# Altium PCB us_#1.PcbDoc
Units mm, origin at the board's own origin, x right, y up, seen from the top; angles counter-clockwise.
Board outline 35.5 x 50 mm, 2 copper layers (Top Layer, Bottom Layer); 23 components, 13 nets, 121 pads, 7 vias.
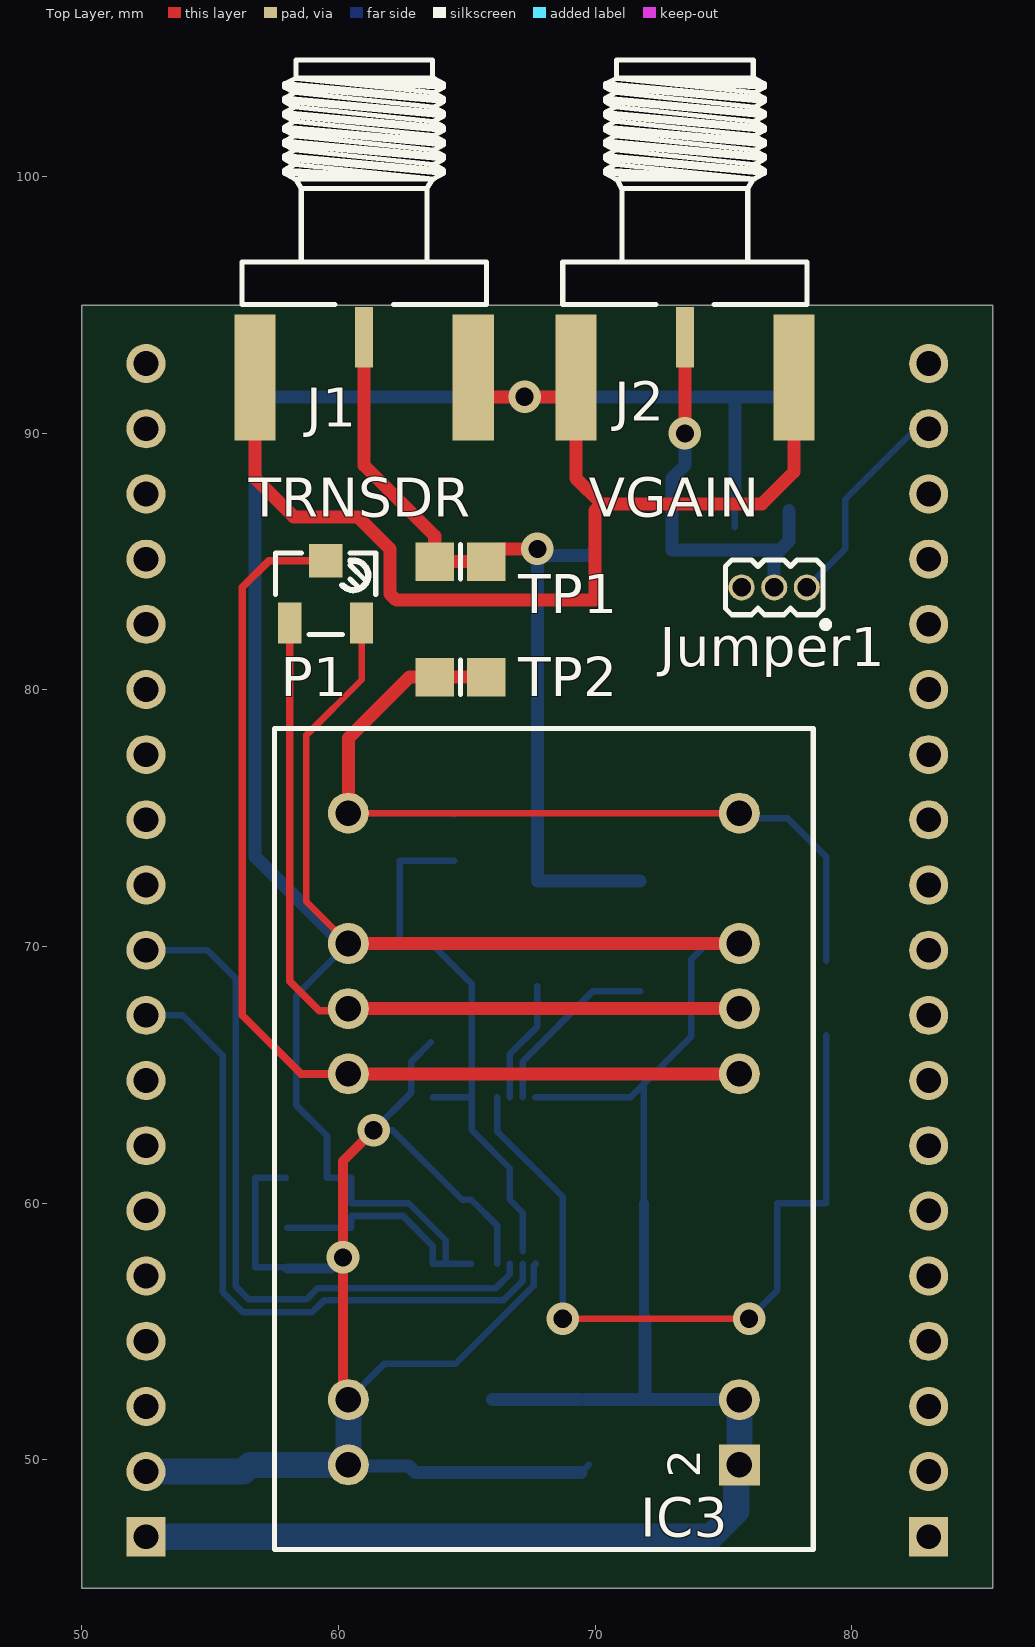
[diagram p0: Top Layer view]
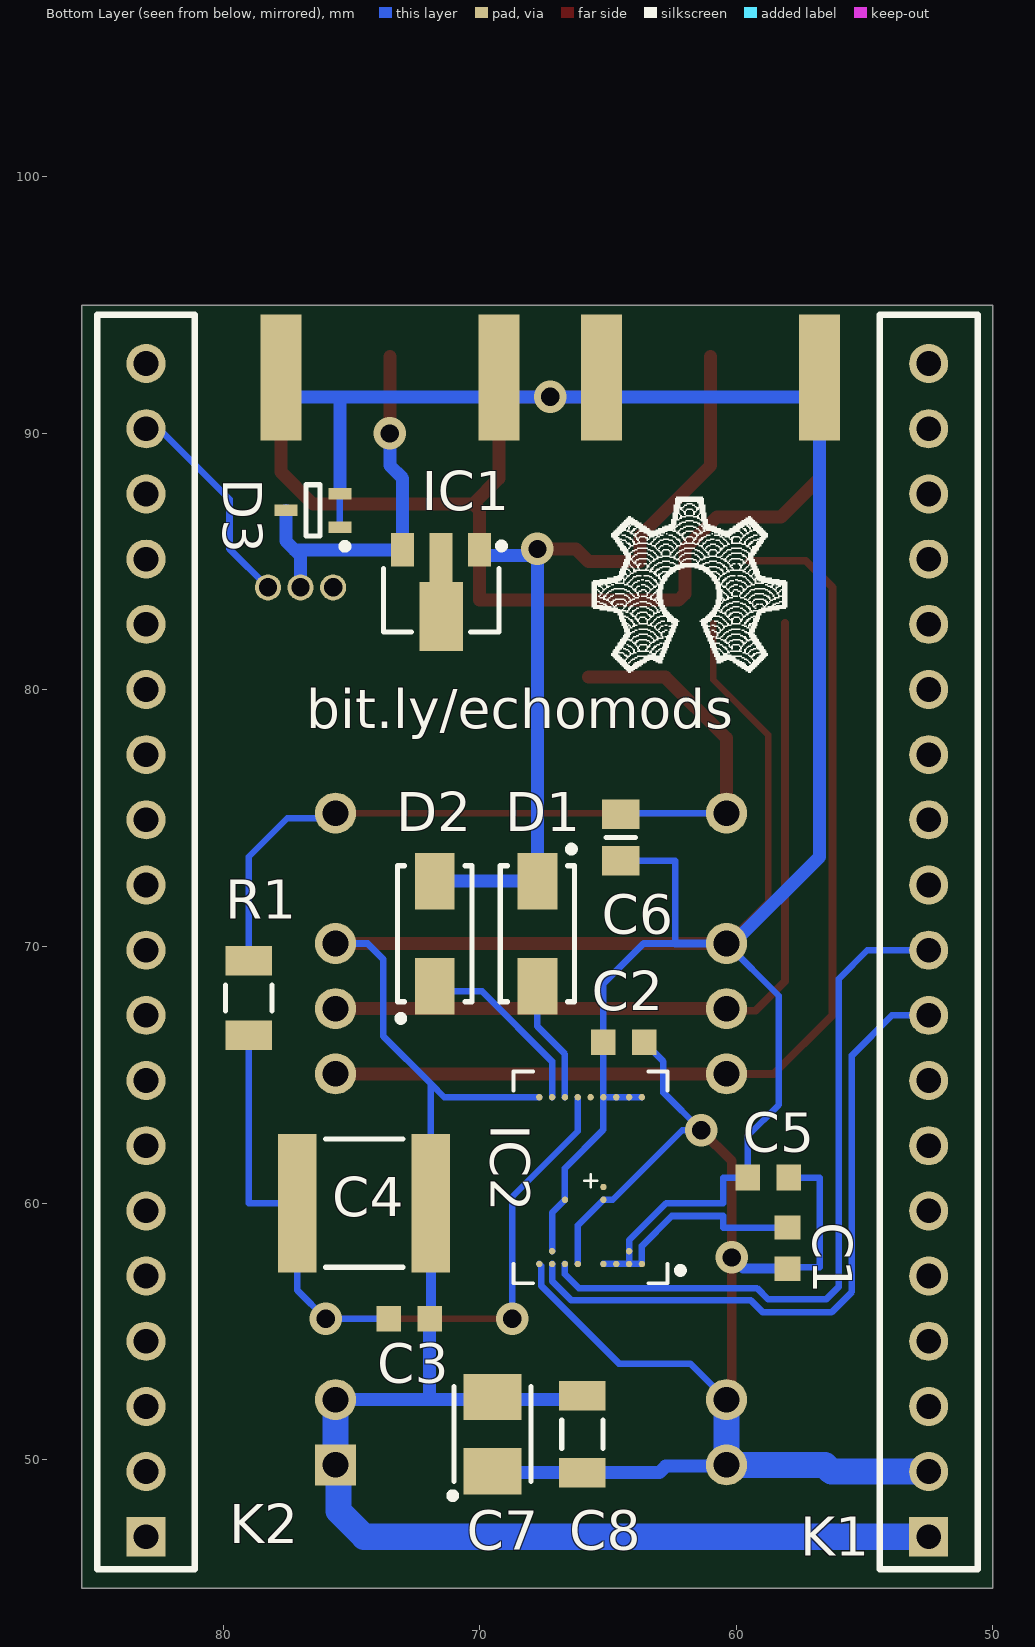
[diagram p1: Bottom Layer view, seen from below]
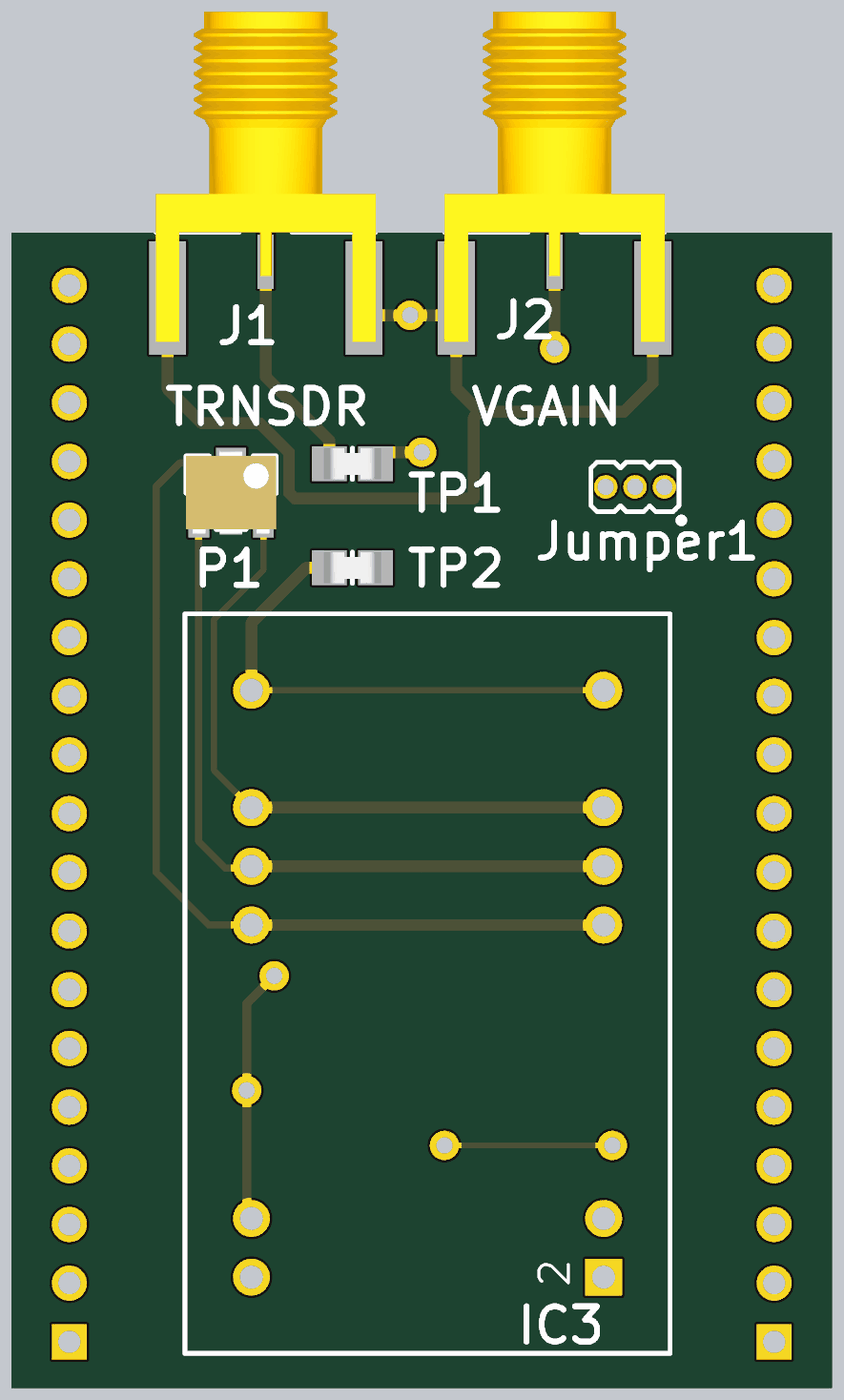
[diagram p2: 3D render of the assembled board from above, using the file's embedded part models]
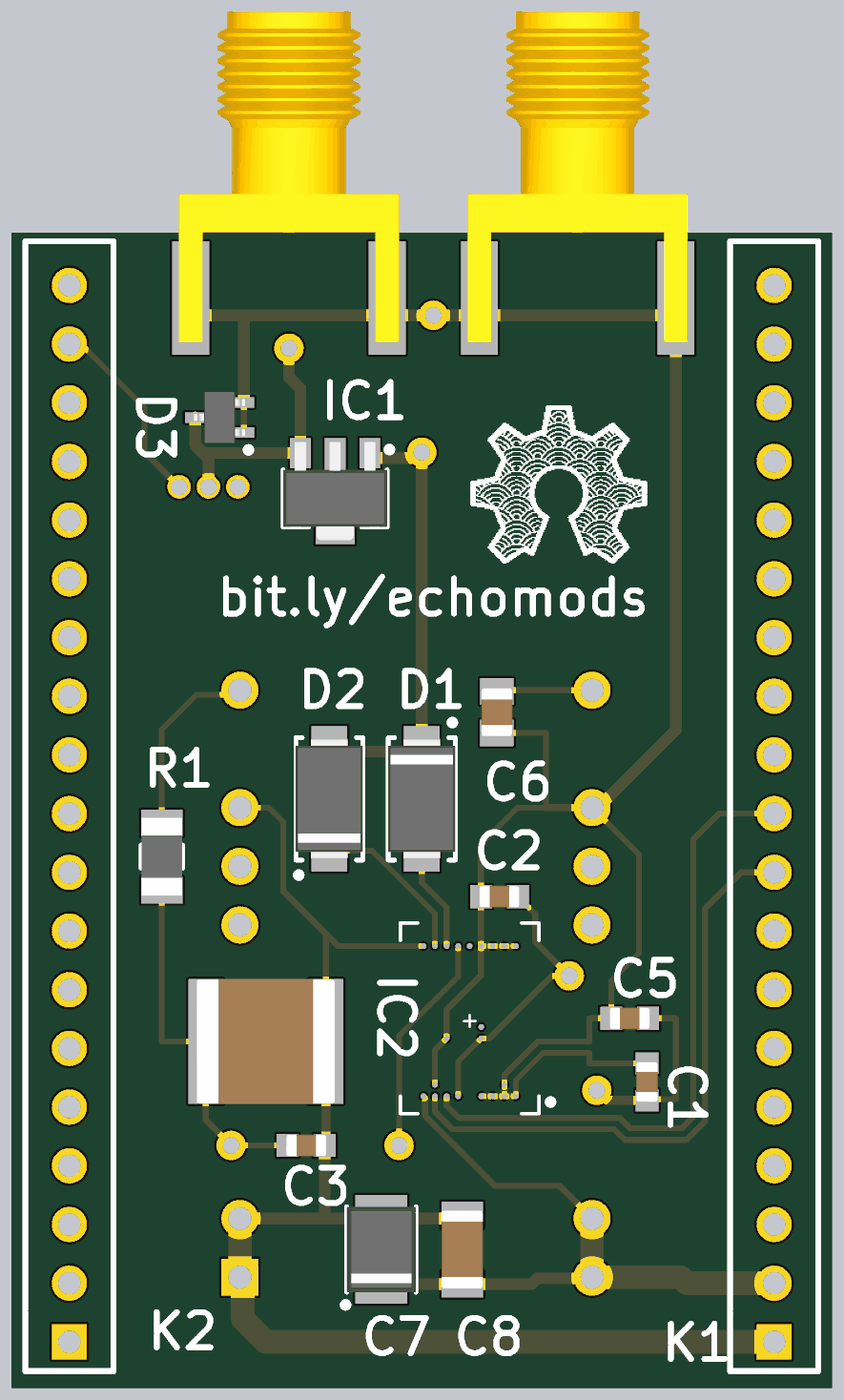
[diagram p3: 3D render of the assembled board from below, using the file's embedded part models]

## Layer stack, top to bottom
Top Solder: solder mask 0.0102, Solder Resist, Dk 3.5
Top Layer: signal copper 0.0356
Dielectric 1: dielectric 0.32, FR-4, Dk 4.8
Bottom Layer: signal copper 0.0356
Bottom Solder: solder mask 0.0102, Solder Resist, Dk 3.5

## Board outline
50,45 85.5,45 85.5,95 50,95

## Design rules (kind name [scope] priority, off if disabled: settings)
Clearance [All] p1: gap=0.178
MinimumSolderMaskSliver [All] p1 off: minsoldermaskwidth=0.2
PolygonConnect [All] p1: connectstyle=Relief reliefconductorwidth=0.254 reliefentries=4 polygonreliefangle="90 Angle" airgapwidth=0.254
RoutingVias [All] p1: holewidth=0.711 width=1.27 viastyle="Through Hole" minholewidth=0.711 minwidth=1.27 maxholewidth=0.711 maxwidth=1.27
SilkToSilkClearance [All] p1 off: silktosilkclearance=0.254
SilkToSolderMaskClearance [IsPad] p1 off: minsilkscreentomaskgap=0.2 clearancetoexposedcopper=TRUE
SolderMaskExpansion [All] p1: expansion=0.102
Width [All] p1: maxlimit=1.016 minlimit=0.254 preferedwidth=0.254 minimp=50.000000 maximp=50.000000 favimp=50.000000
27 further rules are at their usual default settings.

## Classes and differential pairs
net class RF: NetD1_1 NetD3_3

## Components (designator, comment, footprint, x,y, rotation, side; value= is the part's Value field where it differs from the comment)
C1 "100nF" CAPC1608X87N 58,58.25 r270 bottom
C2 "100nF" CAPC1608X87N 64.389,66.269 r180 bottom
C3 "100nF" CAPC1608X87N 72.75,55.5 r0 bottom
C4 "1uF" CAPC5650X165N 74.5,60 r0 bottom
C5 "100nF" CAPC1608X87N 58.75,61 r180 bottom
C6 "4.7nF" CAPC2012X110N 64.5,74.25 r90 bottom
C7 "10uF" CAPMP3528X210N 69.5,51 r90 bottom
C8 "47uF" CAPC3216X180N 66,51 r270 bottom
D1 "ES1D" DIOM5027X244N 67.75,70.5 r270 bottom
D2 "ES1D" DIOM5027X244N 71.75,70.5 r90 bottom
D3 "BAT64-04W" SOT65P210X100-3N 76.5,87 r0 bottom
IC1 "MD0100N8-G" SOT89 71.5,83.5 r270 bottom
IC2 "HV7360LA-G" HV7360_BGA 63.676,64.13 r0 bottom
IC3 "R05-100B" PWS_RECOM_R05-100B 68,62.5 r90 top
J1 "SMA" AMPHENOL_132357-11 61,93.75 r270 top
J2 "SMA" AMPHENOL_132357-11 73.5,93.75 r270 top
Jumper1 "Family" SULLINS_GRPB031VWVN 78.25,84 r180 top
K1 "PLS_2.54mm-19" PLS_2.54mm-19 52.5,47 r180 bottom
K2 "PLS_2.54mm-19" PLS_2.54mm-19 83,47 r180 bottom
P1 "5k" TRIM_BOURNS_3223W 59.5,83.75 r0 top
R1 "4k7" RESC3216X65N 79,68 r90 bottom
TP1 "Test Point" NICOMATIC_C12000B 64.75,85 r0 top
TP2 "Test Point" NICOMATIC_C12000B 64.75,80.5 r180 top

## Footprints (in the part's own frame and the unit in brackets; to place one, negate y for a bottom-side part, rotate by r counter-clockwise, add the part's x,y. Pads: shape width x height; smd on the part's side, far side on the other; paste and mask are expansions set on the pad)
AMPHENOL_132357-11 [mm]
  rect 2.35x0.7 smd: 1(0,0)
  rect 4.9x1.6 smd: 2(1.575,4.25) 2(1.575,-4.25)
  rect 4.9x1.6 smd far side: 2(1.575,4.25) 2(1.575,-4.25)
  silkscreen extent -10.81,-4.76 -1.28,4.76, body extent -10.8,-4.76 3.48,4.76, height 4.08
CAPC1608X87N [mm]
  rect 0.95x1 smd: 1(-0.8,0) 2(0.8,0)
  body extent -0.87,-0.47 0.88,0.48, height 0.87
CAPC2012X110N [mm]
  rect 1.15x1.45 smd: 1(-0.9,0) 2(0.9,0)
  silkscreen extent 0,-0.58 0,0.58, body extent -1.05,-0.67 1.05,0.68, height 1.1
CAPC3216X180N [mm]
  rect 1.15x1.8 smd: 1(-1.5,0) 2(1.5,0)
  silkscreen extent -0.55,-0.8 0.55,0.8, body extent -1.7,-0.9 1.7,0.9, height 1.8
CAPC5650X165N [mm]
  rect 1.5x5.4 smd: 1(-2.6,0) 2(2.6,0)
  silkscreen extent -1.5,-2.5 1.5,2.5, body extent -3,-2.7 3,2.7, height 1.65
CAPMP3528X210N [mm]
  rect 1.8x2.25 smd: 1(-1.45,0) 2(1.45,0)
  silkscreen extent -2.52,-1.5 1.85,1.68, body extent -1.85,-1.5 1.85,1.5, height 2.1
DIOM5027X244N [mm]
  rect 2.2x1.55 smd: 1(-2.05,0) 2(2.05,0)
  silkscreen extent -3.42,-1.45 2.65,1.45, body extent -2.6,-1.45 2.6,1.45, height 2.44
HV7360_BGA [mm]
  round 0.25 smd: A1(0,6.5) A2(0.5,6.5) A3(1,6.5) A4(1.5,6.5) A6(2.5,6.5) A7(3,6.5) A8(3.5,6.5) A9(4,6.5) B2(0.5,6) B8(3.5,6) F4(1.5,4) F7(3,4) G4(1.5,3.5) P1(0,0) P2(0.5,0) P3(1,0) P4(1.5,0) P5(2,0) P6(2.5,0) P7(3,0) P8(3.5,0) P9(4,0)
  silkscreen extent -1.6,-1 5,7.25
NICOMATIC_C12000B [mm]
  rect 1.5x1.5 smd: 1(-1,0) 1(1,0)
  silkscreen extent 0,-0.67 0,0.67, body extent -1.25,-0.67 1.25,0.68, height 1.5
PLS_2.54mm-19 [mil] "soldering pads"
  rect 60x60 hole 38: 1(0,0)
  round 60 hole 38: 2(0,100) 3(0,200) 4(0,300) 5(0,400) 6(0,500) 7(0,600) 8(0,700) 9(0,800) 10(0,900) 11(0,1000) 12(0,1100) 13(0,1200) 14(0,1300) 15(0,1400) 16(0,1500) 17(0,1600) 18(0,1700) 19(0,1800)
  silkscreen extent -75,-50 75,1875
PWS_RECOM_R05-100B [mm]
  rect 1.6x1.6 hole 1: 2(-12.7,-7.62)
  round 1.6 hole 1: 3(-10.16,-7.62) 8(2.54,-7.62) 9(5.08,-7.62) 10(7.62,-7.62) 12(12.7,-7.62) 13(12.7,7.62) 15(7.62,7.62) 16(5.08,7.62) 17(2.54,7.62) 22(-10.16,7.62) 23(-12.7,7.62)
  silkscreen extent -16,-10.5 16,10.5, body extent -16,-10.5 16,10.5, height 9.4
RESC3216X65N [mm]
  rect 1.15x1.8 smd: 1(-1.45,0) 2(1.45,0)
  silkscreen extent -0.5,-0.9 0.5,0.9, body extent -1.67,-0.87 1.68,0.88, height 0.65
SOT65P210X100-3N [mm]
  rect 0.9x0.45 smd: 1(-1.05,0.65) 2(-1.05,-0.65) 3(1.05,0)
  silkscreen extent -1.37,-1 0.28,1.52, body extent -1.1,-1.1 1.1,1.1, height 1
SOT89 [mm]
  rect 1.3x0.9 smd: 1(-1.965,1.5) 3(-1.965,-1.5)
  rect 1.9x0.9 smd: 2(-1.665,0)
  rect 2.7x1.7 smd: 2(0.635,0)
  silkscreen extent -2.24,-2.25 1.24,2.47, body extent -2.44,-2.25 1.81,2.25, height 1.6
SULLINS_GRPB031VWVN [mil]
  round 40 hole 28: 1(0,0) 2(50,0) 3(100,0)
  silkscreen extent -33,-42 125,61
TRIM_BOURNS_3223W [mm]
  rect 0.9x1.6 smd: 1(-1.4,-1.14) 3(1.4,-1.14)
  rect 1.3x1.3 smd: 2(0,1.29)
  silkscreen extent -1.95,-1.59 1.95,1.59, body extent -1.95,-1.81 1.95,1.81, height 4.16

## Part data
C1 C2 C3 C5: library part CC0603_100NF_50V_10%_X7R, "Non-polarised capacitor"
C4: library part CC2220_1UF_200V_10%_X7R, "Non-polarised capacitor"
C6: library part CC0805_4.7NF_250V_10%_X7R, "Non-polarised capacitor"
C7: library part CTE3528-21_10UF_16V_10%_LESR0800, "Polarised capacitor"
C8: library part CC1206_47UF_25V_20%_X5R, "Non-polarised capacitor"
D1 D2: "Diode"
D3: "Serial Diode"
IC1: "3-Ultra-Sound HV Switch 1=A 2=COM 3=B"
IC3: "Power Supply"
J1 J2: library part AMPHENOL_132357-11
Jumper1: library part "Connector 3 Male", "Connector 3 Male"
P1: library part TRIM_11T_5K_BOURNS_3223W-1-502E, "Trimming Potentiometer"
R1: library part R1206_4K7_1%_0.25W_100PPM, "Resistor - 1%"
TP1 TP2: library part NICOMATIC_C12000B

## Via types
v1: diameter 1.27, hole 0.711, Top Layer to Bottom Layer, 7 vias

## Nets (pads, with @x,y where several pads share a name; then routed paths per layer and width w, separated by ;. In a path a pad name is that pad's centre, name@x,y a point inside that pad or via, vN(x,y) a via of type N, cw(c..) or ccw(c..) an arc to the next point about the centre after c; other vN are vias at no path point)
AGND: C1.1 C2.1 C3.1 C4.1 C5.1 C6.1 C7.2 C8.1 D3.1 D3.2 IC2.A1 IC2.A2 IC2.A3 IC2.A4 IC2.B2 IC2.B8 IC2.F7 IC2.P1 IC2.P2 IC2.P3 IC2.P4 IC2.P9 IC3.2 IC3.3 IC3.10 IC3.15 J1.2 J2.2 K1.1 P1.3 | length 233.2
  Top Layer w0.254: IC3.15 58.75,71.75 58.75,78.25 60.9,80.4 P1.3
  Top Layer w0.508: J1.2@56.75,92.175 56.75,88.25 58.25,86.75 60.75,86.75 62,85.5 62,83.75 62.25,83.5 70,83.5 70,87 70.25,87.25 ; IC3.15 IC3.10 ; J1.2@65.25,91.425 69.25,91.425 69.25,88.25 70.25,87.25 ; J2.2@77.75,91.425 77.75,88.5 76.5,87.25 70.25,87.25
  Bottom Layer w0.254: C1.1 60.5,59.05 60.5,59.5 62.509,59.5 63.676,58.333 IC2.A1 IC2.A2 ; IC3.15 58.344,68.084 58.344,63.83 59.55,62.624 C5.1 60.5,61 60.5,60 62.733,60 64.176,58.556 IC2.B2 IC2.A2 ; IC2.P1 IC2.P2 IC2.P3 IC2.P4 ; C6.1 62.38,73.35 62.38,70.12 63.611,70.12 65.189,68.542 C2.1 65.189,62.852 66.676,61.365 IC2.F7 67.176,59.63 IC2.B8 ; IC2.A4 IC2.A3 IC2.A2 ; IC2.P9 71.38,64.13 71.9,64.65 ; C3.1@71.9,55.55 C3.1 ; C4.1 71.9,64.65 ; D3.1 D3.2 ; IC3.10 74.37,70.12 73.75,69.5 73.75,66.5 71.9,64.65
  Bottom Layer w0.305: IC3.15 62.38,70.12
  Bottom Layer w0.381: C3.1@71.9,55.55 C4.1
  Bottom Layer w0.508: IC3.15@60.13,70.12 56.75,73.5 56.75,91.425 75.45,91.425 ; C8.1@66,52.34 C7.2@69.39,52.34 ; C7.2@69.61,52.34 IC3.3 ; 71.95,52.45 C3.1 ; D3.2 75.45,91.425 ; J2.2@77.75,91.425 75.45,91.425
  Bottom Layer w1.016: K1.1 74.5,47 75.5,48 75.5,49.68 IC3.2 IC3.3
  other v1: 67.25,91.425
HVOUT: C6.2 IC3.12 IC3.13 R1.2 TP2.1 | length 36.8
  Top Layer w0.254: IC3.13 IC3.12
  Top Layer w0.508: IC3.13 60.38,78.12 62.76,80.5 63.75,80.5 TP2.1@65.75,80.5
  Bottom Layer w0.254: IC3.13 64.45,75.2 C6.2 ; IC3.12 75.82,75 77.5,75 79,73.5 R1.2
NetC3_2: C3.2 C4.2 IC2.P6 R1.1 | length 32.8
  Top Layer w0.254: v1(68.734,55.5) v1(76,55.5)
  Bottom Layer w0.254: IC2.P6 66.176,62.805 68.734,60.247 v1(68.734,55.5) ; C3.2 v1(76,55.5) 77.1,56.6 C4.2 79,60 R1.1
NetD1_1: D1.1 D2.2 IC1.1 J1.1 TP1.1 | length 32.4
  Top Layer w0.508: J1.1@61,93 61,88.75 63.75,86 63.75,85 65.75,85 66.25,85.5 v1(67.75,85.5)
  Bottom Layer w0.508: IC1.1 69.785,85.25 67.75,85.25 D1.1 D2.2
NetD1_2: D1.2 IC2.P7 | length 4.8
  Bottom Layer w0.254: IC2.P7 66.676,65.813 67.75,66.886 D1.2
NetD2_1: D2.1 IC2.P8 | length 7.1
  Bottom Layer w0.254: IC2.P8 67.176,65.525 69.901,68.25 D2.1@71.75,68.25
NetD3_3: D3.3 IC1.3 J2.1 Jumper1.2 | length 15.2
  Top Layer w0.508: v1(73.5,90) J2.1@73.5,93
  Bottom Layer w0.508: v1(73.5,90) 73.5,88.75 73,88.25 IC1.3 77.215,85.465 ; Jumper1.2 76.98,85.23 77.215,85.465 ; D3.3 77.55,85.8 77.215,85.465
NetIC3_8: IC3.8 IC3.17 P1.2 | length 40.7
  Top Layer w0.305: P1.2 57.29,85.04 56.25,84 56.25,67.33 58.54,65.04 IC3.17
  Top Layer w0.508: IC3.17 IC3.8
NetIC3_9: IC3.9 IC3.16 P1.1 | length 32
  Top Layer w0.305: P1.1 58.1,68.65 59.25,67.5 60.3,67.5 IC3.16
  Top Layer w0.508: IC3.16 IC3.9
PULSE_A: IC2.A8 K1.9 | length 26
  Bottom Layer w0.254: K1.9 53.93,67.32 55.492,65.758 55.492,56.54 56.29,55.742 58.96,55.742 59.429,56.21 66.421,56.21 67.176,56.966 IC2.A8
PULSE_B: IC2.A7 K1.10 | length 27.7
  Bottom Layer w0.254: K1.10 54.89,69.86 56,68.75 56,56.75 56.5,56.25 58.75,56.25 59.193,56.693 66.142,56.693 66.676,57.228 IC2.A7
VDD_5V: C1.2 C2.2 C5.2 C7.1 C8.2 IC2.A6 IC2.A9 IC2.F4 IC3.22 IC3.23 K1.2 | length 61.1
  Top Layer w0.381: IC3.22 60.173,52.547 v1(60.173,57.887) 60.173,61.646 v1(61.366,62.84)
  Top Layer w1.016: K1.2 K1.2@52.54,49.5
  Bottom Layer w0.254: C5.2 56.75,61 56.75,57.5 57.95,57.5 C1.2 ; IC3.22 61.79,53.75 64.571,53.75 67.608,56.787 67.608,57.562 IC2.A9 ; C2.2 62.84,65.519 62.84,64.313 v1(61.366,62.84) 62.107,62.84 64.817,60.13 IC2.F4 66.176,59.13 IC2.A6 ; C7.1@69.45,49.5 C7.1 C7.1@69.75,49.8
  Bottom Layer w0.381: C1.2 v1@59.736,57.45
  Bottom Layer w0.508: IC3.23@60.43,49.75 62.75,49.75 63,49.5 C8.2 C7.1@69.45,49.5
  Bottom Layer w1.016: K1.2@52.46,49.5 K1.2 56.29,49.54 56.55,49.8 IC3.23 IC3.22
"VGA IN": Jumper1.1 K2.18 | length 7.9
  Bottom Layer w0.254: Jumper1.1 79.75,85.5 79.75,87.43 K2.18@82.5,90.18
pads on no net: IC1.2 IC2.G4 IC2.P5 Jumper1.3 K1.3 K1.4 K1.5 K1.6 K1.7 K1.8 K1.11 K1.12 K1.13 K1.14 K1.15 K1.16 K1.17 K1.18 K1.19 K2.1 K2.2 K2.3 K2.4 K2.5 K2.6 K2.7 K2.8 K2.9 K2.10 K2.11 K2.12 K2.13 K2.14 K2.15 K2.16 K2.17 K2.19

## Silkscreen, mask and mechanical layers (free items; w line width, h text height)
Top Overlay:
  text "TRNSDR" at 56.5,86.75 h1.52
  text "VGAIN" at 69.75,86.75 h1.52
Bottom Overlay:
  drawing of 1520 lines, arcs and shapes, not listed
  text "bit.ly/echomods" at 76.75,78.5 h1.52
Mechanical 1:
  lines w0.254: 50,45 50,95 85.5,95 85.5,91.375 85.5,86.125 85.5,82 85.5,75.75 85.5,64.25 85.5,58 85.5,53.875 85.5,48.625 85.5,45 50,45

## Text inside footprints (layer, text, board x,y; h text height)
IC3: Top Overlay "2" at 74.096,49.292 h1.27 r90